# Altium PCB PCB_Multivibrator.PcbDoc
Units mil, origin at the board's own origin, x right, y up, seen from the top; angles counter-clockwise.
Board outline 400 x 750 mil, 2 copper layers (Top Layer, Bottom Layer); 14 components, 8 nets, 26 pads, 3 vias.
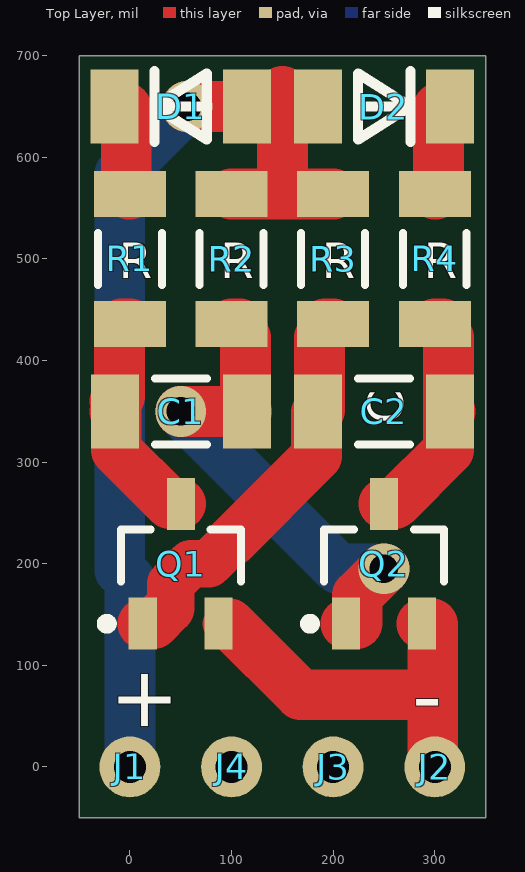
[diagram p0: Top Layer view]
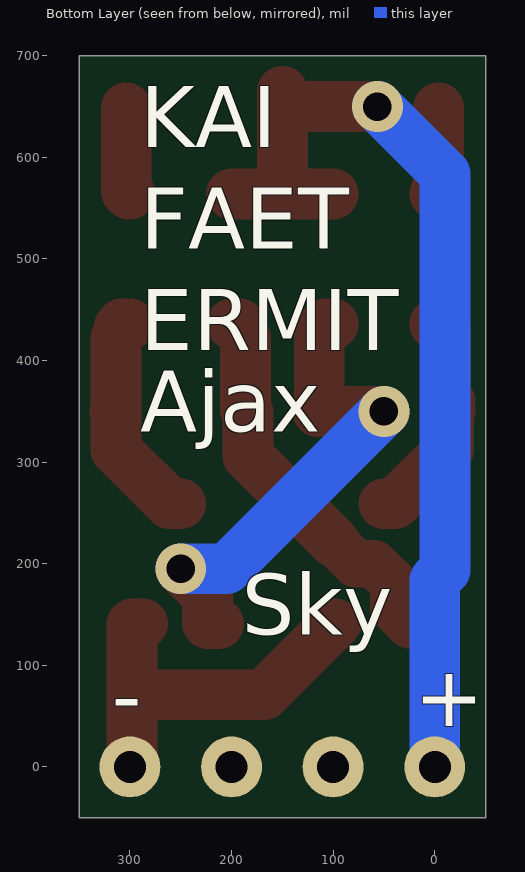
[diagram p1: Bottom Layer view, seen from below]
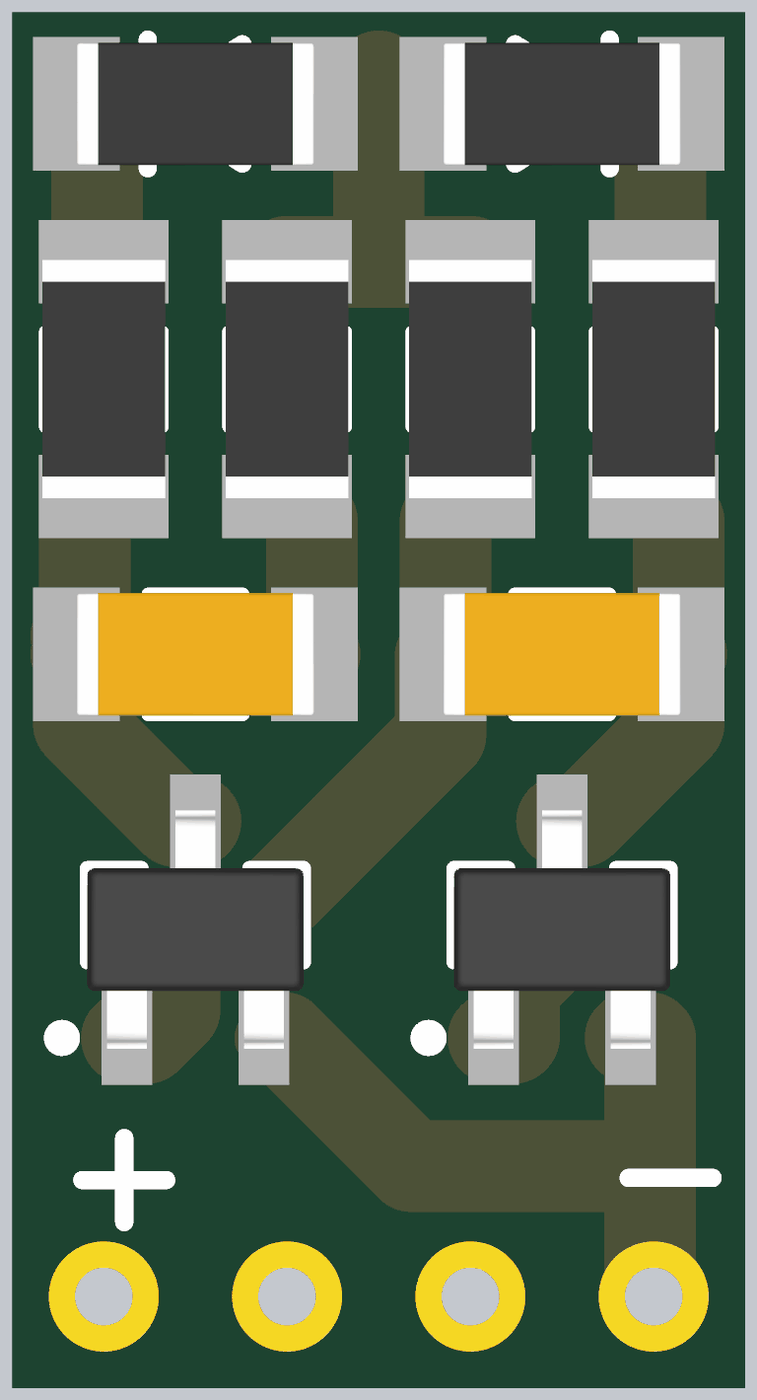
[diagram p2: 3D render of the assembled board from above, using the file's embedded part models]

## Layer stack, top to bottom
Top Solder: solder mask 0.4, Solder Resist, Dk 3.5
Top Layer: signal copper 1.4
Dielectric 1: dielectric 12.6, FR-4, Dk 4.8
Bottom Layer: signal copper 1.4
Bottom Solder: solder mask 0.4, Solder Resist, Dk 3.5

## Board outline
-50,-50 -50,700 350,700 350,-50

## Design rules (kind name [scope] priority, off if disabled: settings)
Clearance [All] p1: gap=10 ignorepadtopadclearanceinfootprint=FALSE
PolygonConnect [All] p1: connectstyle=Relief reliefconductorwidth=10 reliefentries=4 polygonreliefangle="90 Angle" airgapwidth=10
RoutingVias [All] p1: holewidth=28 width=50 viastyle="Through Hole" minholewidth=28 minwidth=50 maxholewidth=28 maxwidth=50
SolderMaskExpansion SolderMaskExpansion_1 [All] p1: expansion=0 istentingtop=FALSE
SupplyNets "Schematic Supply Nets_1" [InNet('GND')] p1: voltage=0.000
SupplyNets "Schematic Supply Nets" [InNet('VCC')] p2: voltage=0.000
Width [All] p1: maxlimit=100 minlimit=10 preferedwidth=50 minimp=50.000000 maximp=50.000000 favimp=50.000000
30 further rules are at their usual default settings.

## Components (designator, comment, footprint, x,y, rotation, side; value= is the part's Value field where it differs from the comment)
C1 "10u" "Capacitor smd 1206" 50,350 r0 top
C2 "10u" "Capacitor smd 1206" 250,350 r0 top
D1 "LED" "LED smd 1206" 50,650 r180 top
D2 "LED" "LED smd 1206" 250,650 r0 top
J1 "+" Pin1 0,0 r0 top
J2 "-" Pin1 300,0 r0 top
J3 "Pin1" Pin1 200,0 r0 top
J4 "Pin1" Pin1 100,0 r0 top
Q1 "NPN" SOT23 50,200 r90 top
Q2 "NPN" SOT23 250,200 r90 top
R1 "1k" "Resistor smd 1206" 0,500 r90 top
R2 "100k" "Resistor smd 1206" 100,500 r90 top
R3 "100k" "Resistor smd 1206" 200,500 r90 top
R4 "1k" "Resistor smd 1206" 300,500 r90 top

## Footprints (in the part's own frame and the unit in brackets; to place one, negate y for a bottom-side part, rotate by r counter-clockwise, add the part's x,y. Pads: shape width x height; smd on the part's side, far side on the other; paste and mask are expansions set on the pad)
"Capacitor smd 1206" [mm] "Chip Capacitor, 2-Leads, Body 3,20x1,60mm, IPC Low Density"
  rect 1.2x1.85 smd: 1(-1.65,0) 2(1.65,0)
  silkscreen extent -0.65,-0.82 0.65,0.82, body extent -1.65,-0.85 1.65,0.85, height 0.6
"LED smd 1206" [mm] "Chip Diode, 2-Leads, Body 3,20x1,60mm, IPC Low Density"
  rect 1.2x1.85 smd: A(-1.65,0) C(1.65,0)
  silkscreen extent -0.65,-0.89 0.66,0.89, body extent -1.65,-0.85 1.65,0.85, height 0.6
Pin1 [mil]
  round 60 hole 31.5: 1(0,0)
"Resistor smd 1206" [mm] "Chip Resistor, 2-Leads, Body 3,20x1,60mm, IPC Low Density"
  rect 1.15x1.8 smd: 1(-1.625,0) 2(1.625,0)
  silkscreen extent -0.65,-0.8 0.65,0.8, body extent -1.65,-0.85 1.65,0.85, height 0.6
SOT23 [mm] "SOT23, 3-Leads, Body 2,85x3,00mm, Pitch 0,95mm, IPC Low Density"
  rect 1.3x0.7 smd: B(-1.5,0.95) C(1.5,0) E(-1.5,-0.95)
  silkscreen extent -1.62,-1.5 0.85,1.97, body extent -1.65,-1.5 1.65,1.5, height 1.1

## Part data
C1 C2: library part Capasitor
J1 J2: library part Pin1
Q1 Q2: library part "Transistor NPN"
R1 R2 R3 R4: library part Resistor

## Via types
v1: diameter 50, hole 28, Top Layer to Bottom Layer, tented both sides, 3 vias

## Nets (pads, with @x,y where several pads share a name; then routed paths per layer and width w, separated by ;. In a path a pad name is that pad's centre, name@x,y a point inside that pad or via, vN(x,y) a via of type N, cw(c..) or ccw(c..) an arc to the next point about the centre after c; other vN are vias at no path point)
GND: J2.1 Q1.E Q2.E | length 391.7
  Top Layer w32.3: Q1.E Q1.E@98.03,140.94
  Top Layer w50: Q1.E@98.03,140.94 167.84,71.13 298.09,71.13 ; Q2.E 297.5,140.94 298.09,140.35 298.09,71.13 ; J2.1 298.09,1.91 298.09,71.13
NetC1_1: C1.1 Q1.C R1.1 | length 211
  Top Layer w50: C1.1 -13.58,348.62 -13.58,312.01 39.37,259.06 Q1.C ; C1.1@-14.96,360.04 -10.43,364.57 -10.43,433.66 -8.07,436.02 R1.1
NetC1_2: C1.2 Q2.B R2.1 | length 501.9
  Top Layer w50: v1(50,350) C1.2 113.58,351.38 113.58,422.44 110.43,425.59 110.43,433.66 108.07,436.02 R2.1 ; Q2.B 223.23,140.94 223.82,141.54 223.82,168.82 v1(250,195)
  Bottom Layer w50: v1(50,350) 205,195 v1(250,195)
NetC2_1: C2.1 Q1.B R3.1 | length 394.1
  Top Layer w46.93: 38.62,156.34 40.16,157.87 40.16,180.4 59.76,200 77.64,200 98.78,221.14
  Top Layer w50: Q1.B 23.23,140.94 38.62,156.34 ; 98.78,221.14 183.66,306.02 183.66,348.62 C2.1 186.42,351.38 186.42,422.44 189.57,425.59 189.57,433.66 191.93,436.02 R3.1
NetC2_2: C2.2 Q2.C R4.1 | length 221
  Top Layer w50: Q2.C 260.63,259.06 313.58,312.01 313.58,348.62 C2.2 313.58,351.38 313.58,422.44 310.43,425.59 310.43,433.66 308.07,436.02 R4.1
NetD1_C: D1.C R1.2 | length 86.8
  Top Layer w50: D1.C@-3.58,648.62 -3.58,566.34 -1.22,563.98 R1.2
NetD2_C: D2.C R4.2 | length 86.8
  Top Layer w50: R4.2 301.22,563.98 303.58,566.34 D2.C@303.58,648.62
VCC: D1.A D2.A J1.1 R2.2 R3.2 | length 951.2
  Top Layer w50: v1(56.4,650) D1.A D1.A@124.96,650 ; R2.2 150,563.98 ; 150,665 150,563.98 ; R3.2 150,563.98
  Bottom Layer w50: J1.1 0,183.78 -10,193.78 -10,583.6 v1(56.4,650)
pads on no net: J3.1 J4.1

## Silkscreen, mask and mechanical layers (free items; w line width, h text height)
Top Overlay:
  text "R" at -11,481 h35
  text "R" at 89,481 h35
  text "R" at 189,481 h35
  text "R" at 289,481 h35
  text "C" at 269,338 h35 r90
Bottom Overlay:
  text "KAI" at 290,610 h60
  text "FAET" at 290,510 h60
  text "ERMIT" at 290,410 h60
  text "Ajax" at 290,329.99 h60
  text "Sky" at 190,129.99 h60
  text "-" at 318,41.01 h60
  text "+" at 20,40 h60
Mechanical 1:
  the board outline again, w10